# Altium PCB PCB3.PcbDoc
Units mil, origin at the board's own origin, x right, y up, seen from the top; angles counter-clockwise.
Board outline 2126.15 x 984.42 mil, 2 copper layers (Top Layer, Bottom Layer), stack 61.756 mil thick; 39 components, 44 nets, 185 pads, 55 vias.
Unrouted connection lines stored in the file: 1.
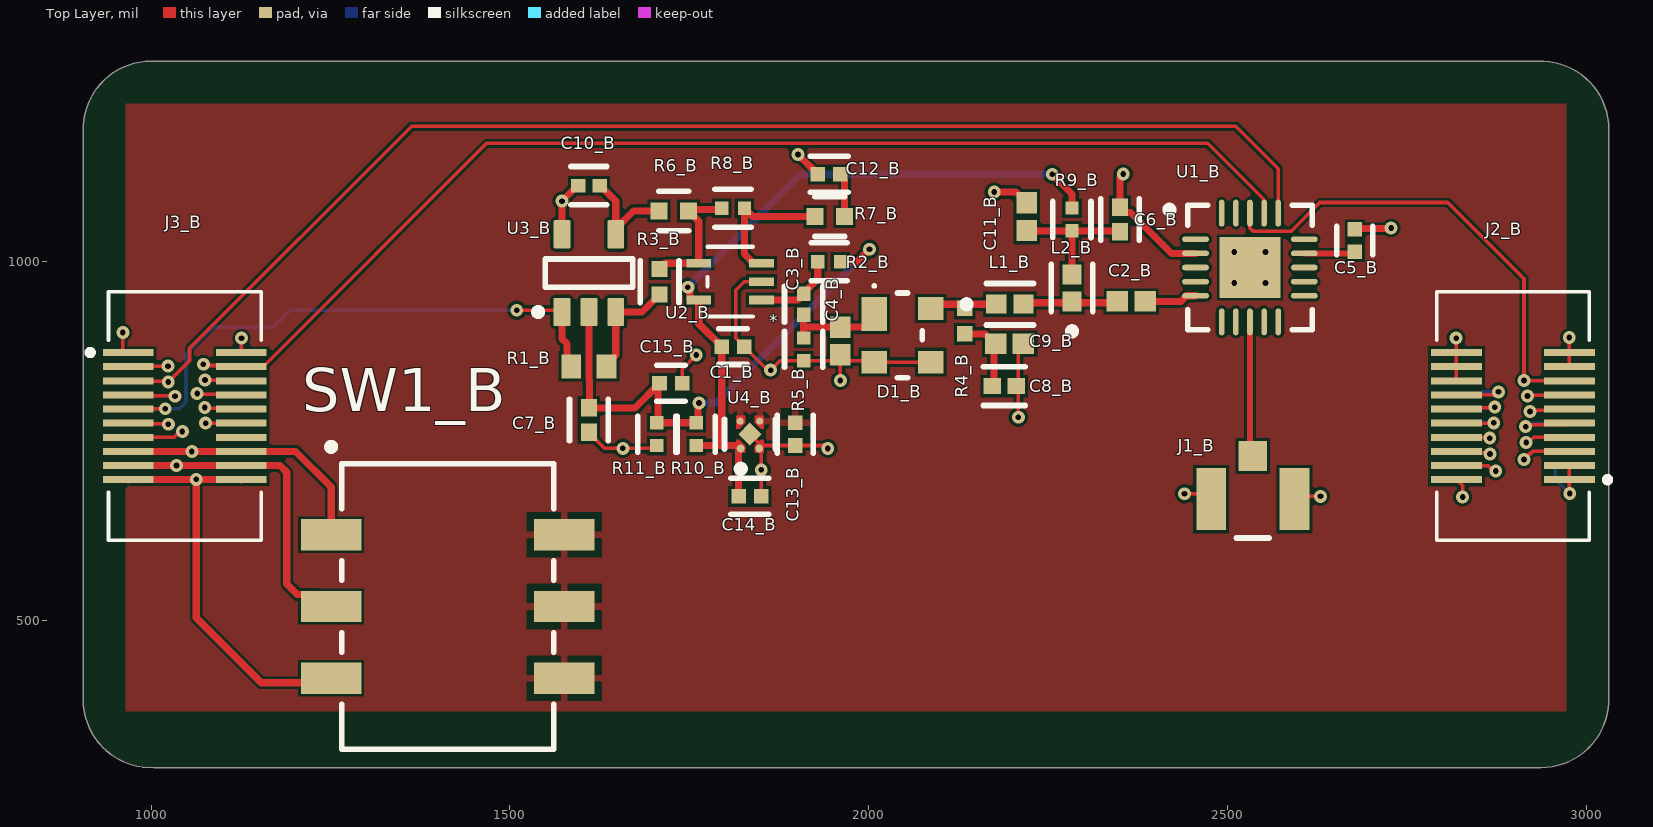
[diagram p0: Top Layer view]
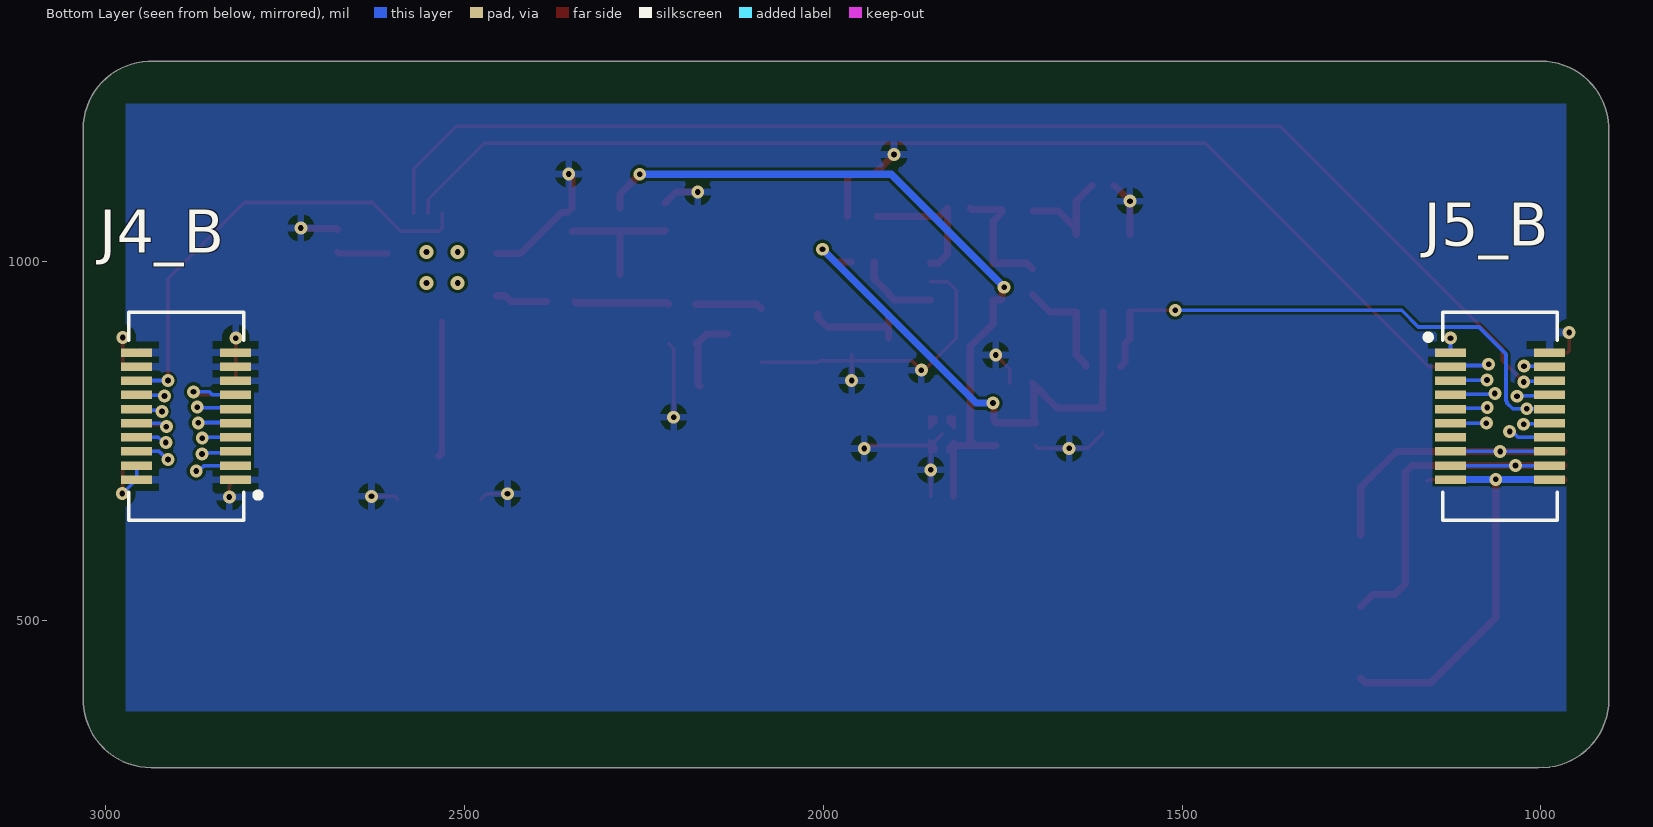
[diagram p1: Bottom Layer view, seen from below]
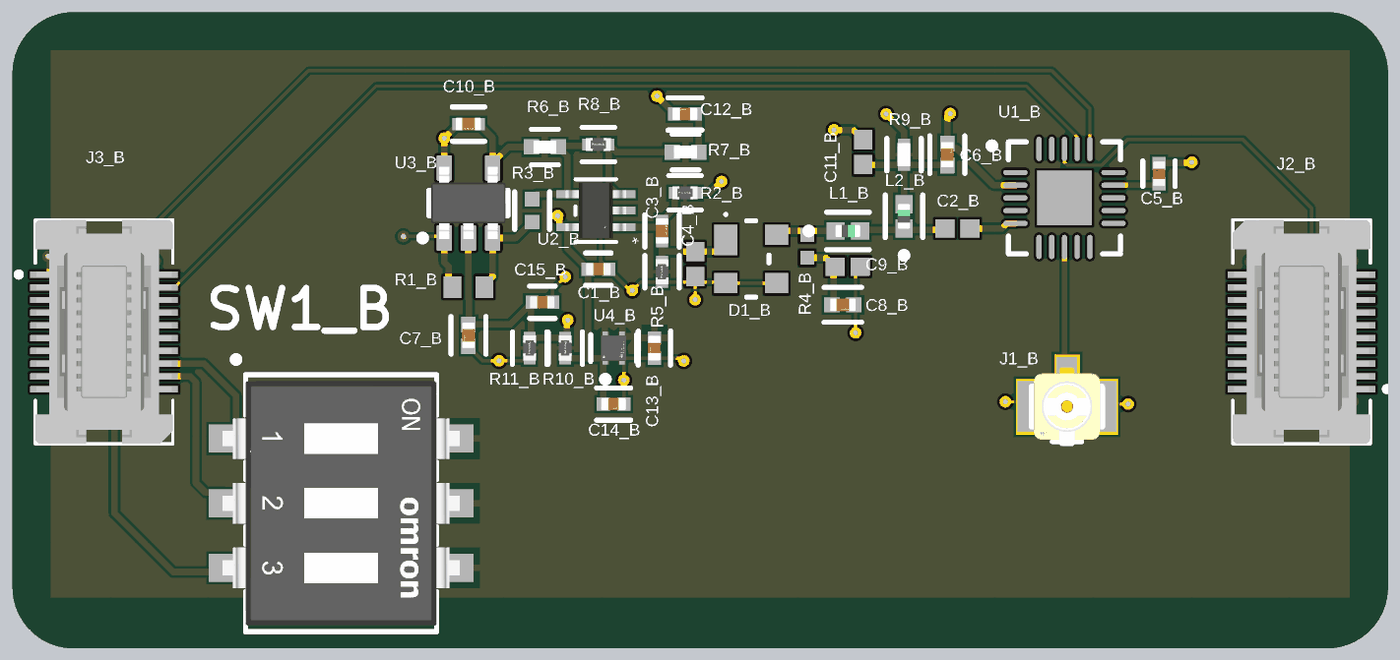
[diagram p2: 3D render of the assembled board from above, using the file's embedded part models]

## Layer stack, top to bottom
Top Solder: solder mask 1, SM-001, Dk 4
Top Layer: signal copper 1.378
Dielectric 1: core 59, Core-043, Dk 4.3
Bottom Layer: signal copper 1.378
Bottom Solder: solder mask 1, SM-001, Dk 4

## Board outline
905.51,389.85 905.51,1181.1 cw(c1000,1185.04) 1000,1279.61 2932.99,1279.61 2933.07,1279.53 cw(c2937.01,1185.04) 3031.58,1185.04 3031.58,393.78 3031.5,393.7 cw(c2937.01,389.76) 2937.01,295.19 1004.02,295.19 1003.94,295.28 cw(c1000,389.76)

## Design rules (kind name [scope] priority, off if disabled: settings)
Clearance [All] p1: gap=4 ignorepadtopadclearanceinfootprint=FALSE
PolygonConnect [All] p1: connectstyle=Relief reliefconductorwidth=10 reliefentries=4 polygonreliefangle="90 Angle" airgapwidth=10
RoutingVias [All] p1: holewidth=8 width=18 viastyle="Through Hole" minholewidth=8 minwidth=18 maxholewidth=28 maxwidth=50
SolderMaskExpansion [All] p1: expansion=4 istentingtop=FALSE
Width [All] p1: maxlimit=50 minlimit=4 preferedwidth=5
30 further rules are at their usual default settings.

## Components (designator, comment, footprint, x,y, rotation, side; value= is the part's Value field where it differs from the comment)
C1_B "C0402C104K8PACTU" FP-C0402-BB-MFG 1811.02,881.89 r180 top value="0.10 μF"
C2_B "GRM1555C1H820JA01D" CAPC1005X55X25ML05T10 2366.14,944.88 r180 top value=82pF
C3_B "CL05B103KB5NNNC" FP-CL165-IPC_C 1909.45,940.94 r90 top
C4_B "GRM1555C1H820JA01D" CAPC1005X55X25ML05T10 1960.63,889.76 r90 top value=82pF
C5_B "C0402C339C5GACTU" FP-C0402-BB-MFG 2677.65,1029.63 r90 top value="3.3 pF"
C6_B "GRM1555C1H102JA01D" FP-GRM155-0_05-IPC_B 2350.39,1059.06 r90 top
C7_B "GRM1555C1H102JA01D" FP-GRM155-0_05-IPC_B 1610.24,779.53 r270 top
C8_B "GRM1555C1H102JA01D" FP-GRM155-0_05-IPC_B 2188.98,826.77 r0 top
C9_B "GRM1555C1H820JA01D" CAPC1005X55X25ML05T10 2196.46,885.83 r180 top value=82pF
C10_B "CL05B103KB5NNNC" FP-CL165-IPC_C 1610.24,1106.3 r0 top
C11_B "GRM1555C1H820JA01D" CAPC1005X55X25ML05T10 2220.47,1062.99 r90 top value=82pF
C12_B "C0402C105K8PACTU" FP-C0402C105K8PACTU-MFG 1944.88,1122.05 r180 top
C13_B "C0402C105K8PACTU" FP-C0402C105K8PACTU-MFG 1897.64,759.84 r270 top
C14_B "C0402C105K8PACTU" FP-C0402C105K8PACTU-MFG 1834.65,673.23 r0 top
C15_B "C0402C104K8PACTU" FP-C0402-BB-MFG 1724.41,830.71 r0 top value="0.10 μF"
D1_B "BAT15-099" INF-SOT143-4-1_V 2047.24,897.64 r0 top
J1_B "U.FL-R-SMT-1(10)" FP-U_FL-R-SMT-1_10-MFG 2535.43,669.29 r0 top
J2_B "52991-0208" MOLEX_52991-0208 2898,785 r90 top
J3_B "52991-0208" MOLEX_52991-0208 1047,785 r270 top
J4_B "53916-0208" "MOLEX-  539160208" 2898,785 r90 bottom
J5_B "53916-0208" "MOLEX-  539160208" 1047,785 r270 bottom
L1_B "LQG15HN18NJ02D" FP-LQG15HH_02-IPC_A 2196.85,940.94 r0 top
L2_B "LQG15HN18NJ02D" FP-LQG15HH_02-IPC_A 2283.46,963.72 r90 top
R1_B "ERJ-3EKF1004V" RESC1608X55X30LL15T15 1610.24,854.33 r180 top
R2_B "ERJ-2RKF1003X" FP-ERJ2RK-IPC_C 1944.88,1000 r0 top
R3_B "CRCW040210K0FKED" FP-CRCW0402-e3-IPC_B 1708.66,972.44 r270 top
R4_B "620" RESC1005X40X25NL05T05 2133.86,917.32 r90 top
R5_B "ERJ-2RKF1003X" FP-ERJ2RK-IPC_C 1909.45,877.95 r90 top
R6_B "CRCW04021K00FKED" FP-CRCW0402-e3-MFG 1728.35,1070.87 r180 top
R7_B "CRCW04021K00FKED" FP-CRCW0402-e3-MFG 1945.87,1062.99 r180 top
R8_B "ERJ-2RKF1003X" FP-ERJ2RK-IPC_C 1811.02,1074.8 r0 top
R9_B "CRCW0402300KFKED" FP-CRCW0402-e3-IPC_C 2283.46,1059.06 r90 top
R10_B "ERJ-2RKF1003X" FP-ERJ2RK-IPC_C 1759.84,759.84 r270 top
R11_B "ERJ-2RKF1003X" FP-ERJ2RK-IPC_C 1704.72,759.84 r90 top
SW1_B "A6SN-3101" FP-A6SN-3101-MFG 1413.39,519.68 r270 top
U1_B "ADG904BCPZ" ADI-CP-20-6_N 2531.5,992.13 r0 top
U2_B "max9914exk+t" 21-0076E_MXM 1807.09,972.44 r180 top
U3_B "LMC7215IM5" DBV0005A_N 1610.24,984.25 r90 top
U4_B "TPS7A0222PDQNR" FP-DQN0004A-MFG 1834.65,759.84 r90 top

## Footprints (in the part's own frame and the unit in brackets; to place one, negate y for a bottom-side part, rotate by r counter-clockwise, add the part's x,y. Pads: shape width x height; smd on the part's side, far side on the other; paste and mask are expansions set on the pad)
21-0076E_MXM [mil]
  rect 34.5x12 smd paste+0 mask+0: 1(-43.75,25.59) 2(-43.75,0) 3(-43.75,-25.59) 4(43.75,-25.59) 5(43.75,25.59)
  silkscreen extent -32,-49 32,49, body extent -47,-44 47,44, height 43
ADI-CP-20-6_N [mm] "QFN, 20-Leads, Body 4x4mm, Pitch 0.5mm, Thermal Pad 2.15x2.15mm, IPC Medium Density"
  oval 0.95x0.2 smd: 1(-1.925,1) 2(-1.925,0.5) 3(-1.925,0) 4(-1.925,-0.5) 5(-1.925,-1) 11(1.925,-1) 12(1.925,-0.5) 13(1.925,0) 14(1.925,0.5) 15(1.925,1)
  oval 0.2x0.95 smd: 6(-1,-1.925) 7(-0.5,-1.925) 8(0,-1.925) 9(0.5,-1.925) 10(1,-1.925) 16(1,1.925) 17(0.5,1.925) 18(0,1.925) 19(-0.5,1.925) 20(-1,1.925)
  rect 2.15x2.15 smd: 21(0,0)
  silkscreen extent -2.97,-2.2 2.2,2.2, body extent -2.05,-2.05 2.05,2.05, height 0.8
CAPC1005X55X25ML05T10 [mm] "Chip Capacitor, 2-Leads, Body 1.00x0.50mm, IPC Low Density"
  rect 0.76x0.72 smd: 1(-0.49,0) 2(0.49,0)
  body extent -0.53,-0.28 0.53,0.27, height 0.55
DBV0005A_N [mm] "SOT23, 5-Leads, Body 3.05x1.75mm, Pitch 0.95mm, IPC Medium Density"
  rrect17% 1x0.6 smd: 1(-1.375,0.95) 2(-1.375,0) 3(-1.375,-0.95) 4(1.375,-0.95) 5(1.375,0.95)
  silkscreen extent -1.5,-1.55 0.5,1.92, body extent -1.42,-1.46 1.42,1.46, height 1.08
FP-A6SN-3101-MFG [mm]
  rect 1.1x2.15 smd paste+0 mask+0: 1(-2.54,-4.125) 2(0,-4.125) 3(2.54,-4.125) 4(2.54,4.125) 5(0,4.125) 6(-2.54,4.125)
  silkscreen extent -5.77,-4.25 5.05,3.75, body extent -5.15,-5.3 5.15,5.3, height 0.25
FP-C0402-BB-MFG [mm]
  rect 0.52x0.52 smd paste+0 mask+0: 1(-0.4,0) 2(0.4,0)
  silkscreen extent -0.5,-0.64 0.5,0.64, body extent -0.8,-0.4 0.8,0.4, height 0.25
FP-C0402C105K8PACTU-MFG [mm]
  rect 0.52x0.52 smd paste+0 mask+0: 1(-0.4,0) 2(0.4,0)
  silkscreen extent -0.67,-0.64 0.67,0.64, body extent -0.8,-0.4 0.8,0.4, height 0.25
FP-CL165-IPC_C [mil]
  rect 20.29x18.6 smd paste+0 mask+0: 1(-14.9,0) 2(14.9,0)
  silkscreen extent -25,-27 25,27, body extent -29,-15 29,15, height 10
FP-CRCW0402-e3-IPC_B [mil]
  rect 22.37x22.54 smd paste+0 mask+0: 1(-17.8,0) 2(17.8,0)
  silkscreen extent -29,-27 29,27
FP-CRCW0402-e3-IPC_C [mil]
  rect 18.43x18.6 smd paste+0 mask+0: 1(-15.83,0) 2(15.83,0)
  silkscreen extent -25,-27 25,27, body extent -29,-15 29,15, height 10
FP-CRCW0402-e3-MFG [mm]
  rect 0.6x0.6 smd paste+0 mask+0: 1(-0.525,0) 2(0.525,0)
  silkscreen extent -0.53,-0.7 0.53,0.7, body extent -0.92,-0.4 0.92,0.4, height 0.25
FP-DQN0004A-MFG [mm]
  round 0.279 smd paste-1000 mask-1000: 1(-0.505,0.33) 2(-0.505,-0.33)
  round 0.251 smd paste-1000 mask-1000: 3(0.459,-0.346) 4(0.459,0.346)
  rect 0.58x0.58 smd rot 135 paste-1000 mask-1000: 5(0,0)
  Top Layer region: -0.66,-0.485 -0.2,-0.485 -0.2,-0.385 -0.41,-0.175 -0.66,-0.175
  Top Layer region: 0.66,0.485 0.2,0.485 0.2,0.385 0.41,0.175 0.66,0.175
  Top Layer region: 0.66,-0.485 0.2,-0.485 0.2,-0.385 0.41,-0.175 0.66,-0.175
  Top Layer region: -0.66,0.485 -0.2,0.485 -0.2,0.385 -0.41,0.175 -0.66,0.175
  silkscreen extent -1.35,-0.9 0.53,0.9, body extent -0.76,-0.63 0.76,0.63, height 0.25
FP-ERJ2RK-IPC_C [mil]
  rect 18.43x18.6 smd paste+0 mask+0: 1(-15.83,0) 2(15.83,0)
  silkscreen extent -25,-27 25,27, body extent -29,-15 29,15, height 10
FP-GRM155-0_05-IPC_B [mil]
  rect 24.23x22.54 smd paste+0 mask+0: 1(-16.87,0) 2(16.87,0)
  silkscreen extent -29,-27 29,27, body extent -35,-17 35,17, height 10
FP-LQG15HH_02-IPC_A [mil]
  rect 28.16x26.48 smd paste+0 mask+0: 1(-18.84,0) 2(18.84,0)
  silkscreen extent -65,-29 33,29, body extent -41,-21 41,21, height 10
FP-U_FL-R-SMT-1_10-MFG [mm]
  rect 1x1.05 smd paste-1000 mask+0: 1(0,1.525)
  rect 1.05x2.2 smd paste-1000 mask+0: 2(-1.475,0) 3(1.475,0)
  silkscreen extent -0.58,-1.38 0.58,-1.38, body extent -2.1,-1.48 2.1,2.15, height 0.25
INF-SOT143-4-1_V [mm] "SOT143, 4-Leads, Body 2.9x1.3 mm"
  rect 0.9x1.2 smd: 1(-1,0.75)
  rect 0.9x0.8 smd: 2(-1,-0.95) 3(1,-0.95) 4(1,0.95)
  silkscreen extent -1.05,-1.5 0.7,1.8, body extent -0.65,-1.45 0.65,1.45, height 1.1
"MOLEX-  539160208" [mm]
  rect 0.3x1.1 smd: 1(-2.25,1.5) 2(-2.25,-2) 3(-1.75,1.5) 4(-1.75,-2) 5(-1.25,1.5) 6(-1.25,-2) 7(-0.75,1.5) 8(-0.75,-2) 9(-0.25,1.5) 10(-0.25,-2) 11(0.25,1.5) 12(0.25,-2) 13(0.75,1.5) 14(0.75,-2) 15(1.25,1.5) 16(1.25,-2) 17(1.75,1.5) 18(1.75,-2) 19(2.25,1.5) 20(2.25,-2)
  silkscreen extent -3.68,-2.89 3.68,1.78, body extent -3.65,-2.3 3.65,1.8, height 3.46
MOLEX_52991-0208 [mm]
  rect 0.25x1.8 smd: 1(-2.25,-2) 2(-2.25,2) 3(-1.75,-2) 4(-1.75,2) 5(-1.25,-2) 6(-1.25,2) 7(-0.75,-2) 8(-0.75,2) 9(-0.25,-2) 10(-0.25,2) 11(0.25,-2) 12(0.25,2) 13(0.75,-2) 14(0.75,2) 15(1.25,-2) 16(1.25,2) 17(1.75,-2) 18(1.75,2) 19(2.25,-2) 20(2.25,2)
  silkscreen extent -4.4,-3.45 4.4,2.7, body extent -4.4,-2.7 4.4,2.7, height 2.28
RESC1005X40X25NL05T05 [mm] "Chip Resistor, 2-Leads, Body 1.00x0.50mm, IPC Medium Density"
  rect 0.55x0.55 smd: 1(-0.45,0) 2(0.45,0)
  body extent -0.53,-0.27 0.53,0.28, height 0.4
RESC1608X55X30LL15T15 [mm] "Chip Resistor, 2-Leads, Body 1.60x0.80mm, IPC High Density"
  rect 0.7x0.85 smd: 1(-0.625,0) 2(0.625,0)
  body extent -0.87,-0.48 0.87,0.48, height 0.55

## Part data
C1_B C15_B: library part CMP-2008-02046-2, "CAP CER 0.1UF 10V X5R 0402", Capacitance="0.10 μF", Manufacturer=Kemet, Package=C0402-BB, Temperature="-55°C to +125°C", Temperature Characteristic=X5R, Temperature Coefficient=15%, Temperature Range High=+125°C, Temperature Range Low=-55°C, Tolerance=0.1, Voltage Rating="10 V", Automotive=No, Category=Cap, ComponentLink2Description=Datasheet, ComponentLink2URL=https://content.kemet.com/datasheets/KEM_C1002_X7R_SMD.pdf, Device Class L1="Passive Components", Device Class L2=Capacitors, Device Class L3="Ceramic Capacitors", Digikey Description="CAP CER 0.1UF 10V X5R 0402", Height=0.55mm, Ipc Land Pattern Name=CAPC10050X50, Lead Free=Yes, Manufacturer Part Number=C0402C104K8PACTU, Material=Ceramic, Mouser Description="Capacitor 100 nF 10 VDC 0402", Octopart=https://octopart.com/c0402c104k8pactu-kemet-140039, RoHS=TRUE
C2_B C4_B C9_B C11_B: library part CMP-2008-04442-1, Manufacturer=Murata, Part Number=GRM1555C1H820JA01D
C3_B C10_B: library part CMP-13271-000387-1, "Cap Ceramic 10nF 50V X7R ±10% SMD 0402 +125°C Paper T/R", Capacitance=10nF, Case Code (Imperial)=0402, Case Code (Metric)=1005, Dielectric=X7R, Max Operating Temperature=125°C, Min Operating Temperature=-55°C, Package Quantity=1, Tolerance=10%, Voltage=50V, Case/Package=0402, Contact Plating=Tin, Depth=0.5mm, Height=0.5mm, Lead Free="Lead Free", Length=1mm, Material=Ceramic, Mount="Surface Mount", Packaging="Tape and Reel", Radiation Hardening=No, Thickness=0.022inch, Voltage Rating=50V, Voltage Rating (DC)=50V, Width=0.02inch
C5_B: library part CMP-2008-03312-2, "Capacitor: ceramic; MLCC; 3.3pF; 50VDC; C0G; ±0.25pF; SMD; 0402", Capacitance="3.3 pF", Manufacturer=Kemet, Package=C0402-BB, Temperature="-55°C to +125°C", Temperature Characteristic=C0G, Temperature Coefficient=15%, Temperature Range High=+125°C, Temperature Range Low=-55°C, Tolerance="0.25 pF", Voltage Rating="50 V", Automotive=No, Category=Cap, ComponentLink2Description=Datasheet, ComponentLink2URL=https://content.kemet.com/datasheets/KEM_C1002_X7R_SMD.pdf, Device Class L1="Passive Components", Device Class L2=Capacitors, Device Class L3="Ceramic Capacitors", Digikey Description="Capacitor: ceramic; MLCC; 3.3pF; 50VDC; C0G; ±0.25pF; SMD; 0402", Height=0.55mm, Ipc Land Pattern Name=CAPC10050X50, Lead Free=Yes, Manufacturer Part Number=C0402C339C5GACTU, Material=Ceramic, Mouser Description="Multilayer Ceramic Capacitors MLCC - SMD/SMT 50volts 3.3pF C0G .25pF", Octopart=https://octopart.com/c0402c339c5gactu-kemet-105751, RoHS=TRUE
C6_B C7_B C8_B: library part CMP-2008-04254-2, "Chip Multilayer Ceramic Capacitors for General Purpose, 0402, 1000pF, C0G, 30ppm/°C, 5%, 50V", Capacitance=1nF, Case Code (Imperial)=0402, Case Code (Metric)=1005, Dielectric=C0G, Dielectric Material=Ceramic, Insulation Resistance=10GR, Max Operating Temperature=125°C, Min Operating Temperature=-55°C, Package Quantity=1, Temperature Coefficient=30ppm/°C, Tolerance=5%, Voltage=50V, Case/Package=0402, Depth=0.5mm, Height=0.5mm, Lead Free="Lead Free", Length=1mm, Material=Ceramic, Mount="Surface Mount", Number of Pins=2, Packaging="Tape and Reel", Radiation Hardening=No, REACH SVHC="No SVHC", Termination=SMD/SMT, Thickness=0.022inch, Voltage Rating=50V, Voltage Rating (DC)=50V, Width=0.5mm
C12_B C13_B C14_B: library part CMP-2008-02081-2, "CAP CER 1UF 10V X5R 0402", Capacitance=1uF, Case Code (Imperial)=0402, Case Code (Metric)=1005, Dielectric=X5R, Dielectric Material=Ceramic, Max Operating Temperature=85°C, Min Operating Temperature=-55°C, Package Quantity=1, Tolerance=10%, Voltage=10V, Case/Package=0402, Construction=Flat, Contact Plating=Tin, Depth=0.5mm, Dissipation Factor=5%, Height=0.5mm, Lead Free="Lead Free", Length=1mm, Mount="Surface Mount", Number of Pins=2, Packaging="Tape and Reel", Radiation Hardening=No, REACH SVHC="No SVHC", RoHS Compliant=Yes, Series=C, Termination=SMD/SMT, Thickness=0.022inch, Voltage Rating=10V, Voltage Rating (DC)=10V, Width=0.5mm
D1_B: library part CMP-1154-00009-1, "Single Silicon Schottky Diode, 110 mA IF Max, SOT143-4-1, Green", Manufacturer=Infineon, ComponentLink1Description="Manufacturer URL", ComponentLink1URL=http://www.infineon.com/, ComponentLink2Description=Datasheet, ComponentLink2URL=http://www.infineon.com/dgdl/bat15series.pdf?folderId=db3a304314dca3890114ff6812070b44&fileId=db3a304314dca3890114ff6b74ca0b48&location=en.Products.RF.RF_Mixer___Detector_Schottky_Diodes.DATASHEET.bat15series.pdf, ComponentLink3Description="Package Specification", ComponentLink3URL=http://www.infineon.com/dgdl/SOT143-Package_Overview.pdf?folderId=db3a30431936bc4b011952ce8b1b3bed&fileId=db3a30431936bc4b011952df42203c0c, Configuration=Single, CT (typ)="0.26 pF", DatasheetVersion=Jun-2011, Green=yes, Group="RF Mixer", IF (max)="110 mA", Mounting Technology="Surface Mount", PackageDescription="4-Pin Small Outline Transistor Package, 1.3 x 2.9 mm Body", PackageReference=SOT143-4-1, PartNumber=BAT15-099, VF (typ)="0.23 V", VR (max)="4 V"
J1_B: library part CMP-2000-05152-3, "CONN U.FL RCPT STR 50 OHM SMD", Dielectric Material=Polymer, Frequency=6GHz, Housing Color=Beige, Insulation Resistance=500MR, Max Operating Temperature=90°C, Min Operating Temperature=-40°C, Package Quantity=2500, Body Material=Bronze, Body Plating=Silver, Connector Type=Coaxial, Contact Material=Brass, Contact Plating=Gold, Depth=3.1mm, Fastening Type=Snap, Gender=Male, Impedance=50R, Lead Free="Lead Free", Length=3mm, Max Frequency=6GHz, Mount="Surface Mount", Orientation=Straight, Packaging="Cut Tape", Radiation Hardening=No, REACH SVHC="No SVHC", Series=U.FL, Termination=Solder, Weight=0.001764oz, Wire/Cable Type=Coaxial
J2_B J3_B: "20 Position Connector Receptacle, Center Strip Contacts Surface Mount Gold", Package=None, Availability=Unavailable, MF=Molex, MP=52991-0208, Price=None, SnapEDA_Link=https://www.snapeda.com/parts/52991-0208/Molex/view-part/230631/?ref=snap
L1_B L2_B: library part CMP-06042-010999-1, "Multilayer type RF Inductor 18nH ±5% 0.51Ω 350mA 0402", Case Code (Imperial)=0402, Case Code (Metric)=1005, Current Rating=300mA, DC Resistance (DCR)=510mR, Inductance=18nH, Inductance Tolerance=5%, Max Operating Temperature=125°C, Min Operating Temperature=-55°C, Package Quantity=1, Self Resonant Frequency=2.1GHz, Test Frequency=100MHz, Case/Package=0402, Core Material=Air, DC Current=300mA, Depth=0.55mm, Height=0.5mm, Height - Seated (Max)=0.022inch, Lead Free="Lead Free", Length=1mm, Max DC Current=300mA, Military Standard=Not, Mount="Surface Mount", Packaging="Tape and Reel", Q Factor=8, Radiation Hardening=No, REACH SVHC="No SVHC", Shielding=Unshielded, Termination=SMD/SMT, Tolerance=5%, Width=0.5mm
R1_B: library part CMP-1012-00849-2, Manufacturer=Panasonic, Resistance=1M, Part Number=ERJ-3EKF1004V
R2_B R5_B R8_B R10_B R11_B: library part CMP-2002-00608-4, "RES SMD 100K OHM 1% 1/10W 0402", Case Code (Imperial)=0402, Case Code (Metric)=1005, Max Operating Temperature=155°C, Max Power Dissipation=100mW, Min Operating Temperature=-55°C, Package Quantity=1, Resistance=100kR, Temperature Coefficient=100ppm/°C, Tolerance=1%, Voltage Rating=50V, Case/Package=0402, Composition="Thick Film", Contact Plating=Tin, Depth=0.5mm, Features="Automotive AEC-Q200", Height=0.35mm, Lead Free="Lead Free", Length=1mm, Military Standard=Not, Mount="Surface Mount", Number of Pins=2, Number of Terminations=2, Packaging="Tape and Reel", Power Rating=100mW, Radiation Hardening=No, REACH SVHC="No SVHC", Termination=SMD/SMT, Voltage Rating (DC)=50V, Width=0.5mm
R3_B: library part CMP-2002-08135-2, "RES SMD 10K OHM 1% 1/16W 0402", Case Code (Imperial)=0402, Case Code (Metric)=1005, Max Operating Temperature=155°C, Max Power Dissipation=63mW, Min Operating Temperature=-55°C, Package Quantity=10, Resistance=10kR, Temperature Coefficient=100ppm/°C, Tolerance=1%, Voltage Rating=50V, Case/Package=0402, Composition="Thick Film", Contact Plating=Tin, Depth=0.5mm, Features="Automotive AEC-Q200", Height=0.35mm, Lead Free="Lead Free", Length=1mm, Military Standard=Not, Mount="Surface Mount", Number of Pins=2, Number of Terminations=2, Packaging="Tape and Reel", Power Rating=63mW, Radiation Hardening=No, Termination=SMD/SMT, Voltage Rating (DC)=50V, Weight=2.3E-05oz, Width=0.02inch
R4_B: library part CMP-2002-01019-1, Manufacturer=Panasonic, Part Number=ERJ-2RKF6200X
R6_B R7_B: library part CMP-2002-08276-2, "RES Thick Film, 1kΩ, 1%, 0.063W, 100ppm/°C, 0402", Case Code (Imperial)=0402, Case Code (Metric)=1005, Max Operating Temperature=155°C, Max Power Dissipation=63mW, Min Operating Temperature=-55°C, Package Quantity=10, Resistance=1kR, Temperature Coefficient=100ppm/°C, Tolerance=1%, Voltage Rating=50V, Case/Package=0402, Composition="Thick Film", Contact Plating=Tin, Depth=0.5mm, Features="Automotive AEC-Q200", Height=0.35mm, Lead Free="Lead Free", Length=1mm, Military Standard=Not, Mount="Surface Mount", Number of Pins=2, Number of Terminations=2, Packaging="Tape and Reel", Power Rating=63mW, Radiation Hardening=No, Termination=SMD/SMT, Voltage Rating (DC)=50V, Weight=2.3E-05oz, Width=0.5mm
R9_B: library part CMP-2002-08495-2, "RES Thick Film, 300kΩ, 1%, 0.063W, 100ppm/°C, 0402", Case Code (Imperial)=0402, Case Code (Metric)=1005, Max Operating Temperature=155°C, Max Power Dissipation=63mW, Min Operating Temperature=-55°C, Package Quantity=10, Resistance=300kR, Temperature Coefficient=100ppm/°C, Tolerance=1%, Voltage Rating=50V, Case/Package=0402, Composition="Thick Film", Contact Plating=Tin, Depth=0.5mm, Features="Automotive AEC-Q200", Height=0.35mm, Lead Free="Lead Free", Length=1mm, Military Standard=Not, Mount="Surface Mount", Number of Pins=2, Number of Terminations=2, Packaging="Tape and Reel", Power Rating=63mW, Radiation Hardening=No, Termination=SMD/SMT, Voltage Rating (DC)=50V, Weight=2.3E-05oz, Width=0.02inch
SW1_B: library part CMP-08827-000007-1, "SWITCH SLIDE DIP SPST 25MA 24V", Ambient Temperature Range High=+85°C, Ambient Temperature Range Low=-30°C, Contact Resistance=200mΩ, Current Rating=25mA, Manufacturer="Omron Electronics Inc-EMC Div", Temperature="-30°C to +85°C", Voltage Rating Dc=24V, Automotive=No, Category=Switch, ComponentLink2Description=Datasheet, ComponentLink2URL=https://omronfs.omron.com/en_US/ecb/products/pdf/en-a6sn.pdf, Device Class L1=Electromechanical, Device Class L2=Switches, Device Class L3="DIP Switches", Digikey Description="SWITCH SLIDE DIP SPST 25MA 24V", Electromechanical Life=1000Cycles, Height=4.55mm, Lead Free=Yes, Manufacturer Part Number=A6SN-3101, Mouser Description="DIP Switches / SIP Switches 3P Knife-Edge, 2.3mm Slide SMT Flat-Act", Number Of Circuits=3, Octopart=https://octopart.com/a6sn-3101-omron-55396000, Package=A6SN-3101, RoHS=TRUE, Standoff Height=0.7mm, Temperature Range High=+85°C, Temperature Range Low=-30°C, Throw Configuration=SPST
U1_B: library part CMP-0290-00002-2, "Wideband 2.5 GHz, 37 dB Isolation at 1 GHz, CMOS 1.65 to 2.75 V, 4:1 Mux / SP4T, -40 to 85 degC, 20-pin QFN (CP-20-1), Tray", Manufacturer="Analog Devices", Bandwidth (Hz)=2.5G, Code_JEDEC=MO-220, ComponentLink1Description="Manufacturer URL", ComponentLink1URL=http://www.analog.com/en/index.html, ComponentLink2Description=Datasheet, ComponentLink2URL=http://www.analog.com/static/imported-files/data_sheets/ADG904_904R.pdf, ComponentLink3Description="Package Specification", ComponentLink3URL=http://www.analog.com/static/imported-files/packages/PKG_PDF/LFCSP(CP)/CP_20_6.pdf, DatasheetVersion="Rev. B", Mounting Technology="Surface Mount", PackageDescription="20-Pin Lead Frame Chip Scale Package, Body 4 x 4 mm, Pitch 0.5 mm", PackageReference=CP-20-6, PackageVersion="061708-A, 07/2011", Packing=Tray, PartNumber=ADG904BCPZ, Supply V Guar Performance=Single_(+2.5V), t transition (s)=12n
U2_B: "No Description Available", Built_By=EMA_UL_Team, Copyright="Copyright (C) 2021 Accelerated Designs. All rights reserved", Manufacturer_Part_Number=max9914exk+t, RefDes=RefDes, SourceLibrary=Maxim_2009-12-17_3b, Type=DEV, Vendor="Maxim Integrated Products"
U3_B: library part CMP-0055-01229-3, "Micro-Power, Rail-to-Rail CMOS Comparators with Open-Drain/Push-Pull Outputs, 5-pin SOT-23", Manufacturer="Texas Instruments", Package Reference=DBV0005A, PackageTopMarking=C02B*XTT, PowerWise=Y, ComponentLink1Description="Datasheet URL", ComponentLink1URL=http://www.ti.com/general/docs/lit/getliterature.tsp?genericPartNumber=LMC7215&fileType=pdf, CompType=Amplifiers, PackageDescription="Molded SOT-23, .115 x .063 x .040 in Body, 5 Lead, .0375 in Pitch", PinCount=5, RoHS=N
U4_B: library part CMP-04917-000120-1, "IC REG LINEAR 1.8V 200MA 4X2SON"

## Via types
v1: diameter 18, hole 8, Top Layer to Bottom Layer, 51 vias
v2: diameter 19.68, hole 7.87, Top Layer to Bottom Layer, 4 vias

## Nets (pads, with @x,y where several pads share a name; then routed paths per layer and width w, separated by ;. In a path a pad name is that pad's centre, name@x,y a point inside that pad or via, vN(x,y) a via of type N, cw(c..) or ccw(c..) an arc to the next point about the centre after c; other vN are vias at no path point)
1v1: C7_B.1 C15_B.1 R2_B.2 R10_B.1 R11_B.2 U3_B.2 | length 754.5
  Top Layer w10: C7_B.1 1674.35,796.4 C15_B.1@1706.69,828.74 ; U3_B.2 1610.24,835.7 1610.84,835.1 C7_B.1@1610.84,800.86 ; C15_B.1 C15_B.1@1706.69,828.74 ; v1(1763.78,803.15) 1762.25,801.62 1762.25,778.08 R10_B.1 R11_B.2 1706.69,777.64 C15_B.1@1706.69,828.74 ; R2_B.2 1983.78,1000 v1(2001.32,1017.54)
  Bottom Layer w10: v1(1763.78,803.15) 1786.93,803.15 v1(2001.32,1017.54)
2v2: C1_B.2 C14_B.1 R9_B.2 R10_B.2 U2_B.5 U4_B.1 | length 1012.5
  Top Layer w10: v1(1748.03,964.57) 1748.03,962.4 1751.09,959.35 1751.09,947.85 1752.09,946.85 U2_B.5 1763.34,913.83 C1_B.2 1795.28,750.7 1788.59,744.01 ; R10_B.2 1788.59,744.01 ; C14_B.1 1818.9,736.94 1821.65,739.69 U4_B.1 1821.39,739.96 1817.34,744.01 1788.59,744.01 ; v1(2255.91,1122.05) 2283.46,1094.49 R9_B.2
  Bottom Layer w10: v1(1748.03,964.57) 1905.51,1122.05 v1(2255.91,1122.05)
AIN6: J3_B.8 J5_B.8 | length 124.7
  Top Layer w5: v1(1064.17,816.45) 1065.13,815.49 1124.78,815.49 J3_B.8
  Bottom Layer w5: v1(1064.17,816.45) 1065.13,815.49 1124.78,815.49 J5_B.8
AIN7: J3_B.9 J5_B.9 R1_B.2 U3_B.1 | length 814.8
  Top Layer w5: J3_B.9 968.48,795.06 1019.47,795.06 v1(1019.68,795.28) ; v1(1509.65,932.56) 1570.39,932.56 U3_B.1
  Top Layer w10: U3_B.1 1572.83,892.76 1579.53,886.06 1579.53,860.43 R1_B.2
  Bottom Layer w5: J5_B.9 988.16,795.06 1019.47,795.06 v1(1019.68,795.28) 1039.37,795.28 1047.24,803.15 1047.24,804.82 1048.67,806.24 1048.67,871.5 1086.37,909.2 1170.8,909.2 1194.16,932.56 v1(1509.65,932.56)
GND: C1_B.1 C4_B.1 C5_B.2 C6_B.2 C7_B.2 C8_B.2 C9_B.1 C10_B.1 C11_B.2 C12_B.2 C13_B.2 C14_B.2 C15_B.2 D1_B.2 D1_B.3 J1_B.2 J1_B.3 J2_B.1 J2_B.2 J2_B.3 J2_B.16 J2_B.17 J2_B.18 J2_B.19 J2_B.20 J3_B.1 J3_B.2 J4_B.1 J4_B.2 J4_B.3 J4_B.16 J4_B.17 J4_B.18 J4_B.19 J4_B.20 J5_B.1 J5_B.2 R5_B.1 R11_B.1 U1_B.2 U2_B.2 U3_B.5 U4_B.2 U4_B.5 | length 1651.6
  Top Layer w5: v1(960.63,901.57) 960.63,876 963.05,873.58 J3_B.1 ; J3_B.2 1125.74,893.46 v1(1125.98,893.7) ; C7_B.2 1610.24,761.81 1631.89,740.16 v1(1657.48,740.16) 1700.87,740.16 R11_B.1 ; C15_B.2 1740.16,850.39 v1(1759.84,870.08) ; U4_B.5 1850.39,744.09 C13_B.2 1938.98,744.09 v1(1943.12,739.95) ; U4_B.2 1847.64,738.34 1850.39,735.59 v1(1850.39,710.19) C14_B.2 ; U2_B.2 1826.77,972.44 1814.96,960.63 1814.96,893.7 C1_B.1 1859.6,849.06 v1(1863.45,849.06) 1876.51,862.12 R5_B.1 C4_B.1@1960.63,862.12 ; v1(1960.63,834.65) C4_B.1@1960.63,862.12 ; C4_B.1 C4_B.1@1960.63,862.12 ; D1_B.3 D1_B.2 2005.99,862.12 C4_B.1@1960.63,862.12 ; v1(2208.66,783.46) 2208.66,878.74 C9_B.1 ; v1(2440.22,676.81) 2469.84,676.81 J1_B.2 ; J1_B.3 2597.44,673.23 v1(2629.92,673.23) ; v1(2818.9,893.7) 2818.9,873.94 J2_B.20 J2_B.18 J2_B.16 ; J2_B.2 2827.9,687.78 v1(2827.9,672.17) ; v1(2976.51,894.43) 2976.74,894.2 J2_B.19 J2_B.17 ; J2_B.3 J2_B.1 2976.74,677.5 v1(2977.25,676.99)
  Top Layer w10: U3_B.5 v1(1572.83,1084.65) 1594.49,1106.3 C10_B.1 ; v1(1901.57,1149.61) C12_B.2 ; v1(2175.14,1097.27) 2205.49,1097.27 C11_B.2 ; v1(2354.93,1122.53) 2350.39,1118 C6_B.2 2350.39,1075.08 2356.66,1068.81 2365,1068.81 2422.01,1011.81 U1_B.2 ; C5_B.2 2678.58,1046.31 2727.41,1046.31 v1(2728.35,1047.24)
  Bottom Layer w5: J5_B.2 1125.98,873.83 v1(1125.98,893.7) ; J4_B.3 2957.06,697.19 v1(2977.25,676.99)
I2C0_SCL: J2_B.12 J4_B.12 | length 109.1
  Top Layer w5: J2_B.12 2821.25,796.83 2872,796.83 v1(2872.7,797.53)
  Bottom Layer w5: J4_B.12 2821.25,796.83 2872,796.83 v1(2872.7,797.53)
I2C0_SDA: J2_B.13 J4_B.13 | length 98.4
  Top Layer w5: v1(2918.23,813.19) 2918.9,813.86 2976.07,813.86 J2_B.13
  Bottom Layer w5: v1(2918.23,813.19) 2918.9,813.86 2956.38,813.86 J4_B.13
I2C1_SCL: J3_B.10 J5_B.10 | length 103.8
  Top Layer w5: v1(1074.79,797.18) 1075.96,796.01 1124.57,796.01 J3_B.10
  Bottom Layer w5: v1(1074.79,797.18) 1075.9,796.07 1124.52,796.07 J5_B.10
I2C1_SDA: J3_B.11 J5_B.11 | length 93.1
  Top Layer w5: J3_B.11 968.98,774.43 1023.31,774.43 v1(1024.03,773.71)
  Bottom Layer w5: J5_B.11 988.67,774.43 1023.31,774.43 v1(1024.03,773.71)
I2S_CLKEXT: J3_B.3 J5_B.3 | length 91.6
  Top Layer w5: J3_B.3 968.61,854.25 1023.27,854.25 v1(1023.62,854.6)
  Bottom Layer w5: J5_B.3 988.3,854.25 1023.27,854.25 v1(1023.62,854.6)
I2S_SCK: J2_B.10 J4_B.10 | length 105.4
  Top Layer w5: J2_B.10 2869.48,775.16 2870.56,776.24 v1(2871.22,775.58)
  Bottom Layer w5: J4_B.10 2820.18,776.07 2870.4,776.07 2870.56,776.24 v1(2871.22,775.58)
I2S_SDI: J2_B.14 J4_B.14 | length 121
  Top Layer w5: J2_B.14 2873.58,814.53 v1(2877.95,818.9)
  Bottom Layer w5: J4_B.14 2851.29,814.53 2855.66,818.9 v1(2877.95,818.9)
I2S_SDO: J2_B.15 J4_B.15 U1_B.18 | length 714.4
  Top Layer w5: U1_B.18 2531.5,1046.85 2535.63,1042.71 2588.98,1042.71 2628.94,1082.68 2807.09,1082.68 2913.39,976.38 v1(2913.39,834.65) 2913.6,834.43 2976.52,834.43 J2_B.15
  Bottom Layer w5: v1(2913.39,834.65) 2956.62,834.65 J4_B.15
I2S_WS: J2_B.11 J4_B.11 | length 92.8
  Top Layer w5: v1(2921.9,791.49) 2923.57,793.17 2975.07,793.17 J2_B.11
  Bottom Layer w5: v1(2921.9,791.49) 2923.57,793.17 2955.38,793.17 J4_B.11
NetC2_B_1: C2_B.1 U1_B.5 | length 73.5
  Top Layer w10: C2_B.1 2435.2,944.88 2443.07,952.76 U1_B.5
NetC2_B_2: C2_B.2 L1_B.2 L2_B.1 | length 132.8
  Top Layer w10: L1_B.2 2217.66,942.91 2344.88,942.91 C2_B.2
NetC3_B_1: C3_B.1 C4_B.2 D1_B.1 R5_B.2 | length 141.7
  Top Layer w10: R5_B.2 1909.45,909.91 ; C3_B.1 1909.45,909.91 ; D1_B.1 2007.87,921.77 1995.16,909.05 C4_B.2 1910.31,909.05 1909.45,909.91
NetC3_B_2: C3_B.2 R2_B.1 U2_B.1 | length 115.5
  Top Layer w10: U2_B.1 1901.29,946.85 1909.45,955 C3_B.2 1909.45,956.69 1921.38,968.63 1921.98,968.63 1929.05,975.7 R2_B.1
NetC5_B_1: C5_B.1 U1_B.14 | length 71.2
  Top Layer w8: U1_B.14 2675.58,1011.81 C5_B.1
NetC6_B_1: C6_B.1 C11_B.1 L2_B.2 R9_B.1 | length 191.2
  Top Layer w10: C11_B.1 2221.23,1042.94 R9_B.1@2283.46,1042.94 ; L2_B.2 R9_B.1@2283.46,1042.94 ; R9_B.1 R9_B.1@2283.46,1042.94 ; C6_B.1 2349.63,1042.94 R9_B.1@2283.46,1042.94
NetC8_B_1: C8_B.1 C9_B.2 R4_B.1 | length 110.2
  Top Layer w10: R4_B.1 2162.6,899.61 2176.38,885.83 C9_B.2 2174.63,883.3 2174.63,829.3 C8_B.1
NetC10_B_2: C10_B.2 R6_B.2 U3_B.4 | length 148
  Top Layer w10: C10_B.2 1625.98,1106.3 1647.64,1084.65 U3_B.4@1647.64,1046.26 ; U3_B.4 U3_B.4@1647.64,1046.26 ; R6_B.2 1672.24,1070.87 U3_B.4@1647.64,1046.26
NetC12_B_1: C12_B.1 R7_B.1 | length 61.5
  Top Layer w10: C12_B.1 1966.54,1116.14 R7_B.1
NetD1_B_4: D1_B.4 L1_B.1 R4_B.2 | length 93.8
  Top Layer w10: D1_B.4 2092.52,940.94 L1_B.1
NetJ1_B_1: J1_B.1 U1_B.8 | length 188.6
  Top Layer w8: J1_B.1@2531.5,733.27 U1_B.8
  Top Layer w10: J1_B.1@2531.5,733.27 J1_B.1
NetR1_B_1: R1_B.1 R3_B.2 U3_B.3 | length 152.3
  Top Layer w10: R1_B.1 1634.84,857.28 1647.64,870.08 U3_B.3 1684.06,930.12 1708.58,954.64 R3_B.2
NetR3_B_1: R3_B.1 R6_B.1 R8_B.1 U2_B.4 | length 182.8
  Top Layer w10: R3_B.1 R3_B.1 1716.54,998.03 U2_B.4 1763.34,1056.55 1750.98,1068.9 1750.98,1072.83 1793.22,1072.83 R8_B.1
NetR7_B_2: R7_B.2 R8_B.2 U2_B.3 | length 196.5
  Top Layer w10: R8_B.2 R8_B.2@1826.86,1074.72 ; U2_B.3 1839.59,998.03 1826.86,1010.76 R8_B.2@1826.86,1074.72 ; R7_B.2 1838.58,1062.99 R8_B.2@1826.86,1074.72
PDOWN: J3_B.12 J5_B.12 | length 99.5
  Top Layer w5: v1@1076.06,775.19 J3_B.12
  Bottom Layer w5: v1@1076.06,775.24 J5_B.12 J5_B.12
  other v1: 1076.03,775.22
QSPI0_MISO: J2_B.6 J4_B.6 | length 96.7
  Top Layer w5: J2_B.6 2821.01,734.04 2864.39,734.04 v1(2866.14,732.28)
  Bottom Layer w5: J4_B.6 2821.01,734.04 2864.39,734.04 v1(2866.14,732.28)
QSPI0_MOSI: J2_B.5 J4_B.5 | length 116.4
  Top Layer w5: v1(2913.39,724.41) 2921.84,732.86 2922.84,732.86 2925.77,735.79 J2_B.5
  Bottom Layer w5: v1(2913.39,724.41) 2914.39,724.41 2925.77,735.79 J4_B.5
QSPI0_SCK: J2_B.7 J4_B.7 | length 106.8
  Top Layer w5: v1(2916.42,748.36) 2919.94,748.36 2927.05,755.47 J2_B.7
  Bottom Layer w5: v1(2916.42,748.36) 2919.94,748.36 2927.05,755.47 J4_B.7
QSPI0_SDIO2: J2_B.8 J4_B.8 | length 96.9
  Top Layer w5: J2_B.8 2819.48,755.69 2865.93,755.69 2865.97,755.73 2866.07,755.62 2866.07,754.63 v1(2865.73,754.28)
  Bottom Layer w5: J4_B.8 2819.48,755.69 2865.93,755.69 2865.97,755.73 2866.07,755.62 2866.07,754.63 v1(2865.73,754.28)
QSPI0_SDIO3: J2_B.9 J4_B.9 | length 106.1
  Top Layer w5: v1(2915.82,770.35) 2918.22,772.75 2974.34,772.75 J2_B.9
  Bottom Layer w5: v1(2915.82,770.35) 2919.33,770.35 2924.14,775.16 J4_B.9
QSPI0_SS0: J2_B.4 J4_B.4 | length 115.7
  Top Layer w5: J2_B.4 2863.06,716.1 2870.5,708.66 v1(2874.02,708.66)
  Bottom Layer w5: J4_B.4 2863.06,716.1 2870.5,708.66 v1(2874.02,708.66)
SQWOUT: J3_B.13 J5_B.13 | length 137.7
  Top Layer w5: J3_B.13 1031.91,755.47 1040.07,763.63 v1(1043.59,763.63)
  Bottom Layer w5: J5_B.13 1031.91,755.47 1040.07,763.63 v1(1043.59,763.63)
UART0_CTS: J3_B.5 J5_B.5 U1_B.16 | length 1884
  Top Layer w5: J3_B.5 969.07,833.41 1023.07,833.41 v1(1023.88,832.6) 1053.59,862.31 1053.59,879.44 1363.12,1188.98 2511.81,1188.98 2570.87,1129.92 U1_B.16
  Bottom Layer w5: J5_B.5 988.75,833.41 1023.07,833.41 v1(1023.88,832.6)
UART0_RTS: J3_B.4 J5_B.4 U1_B.17 | length 1714.2
  Top Layer w5: v1(1072.82,857.3) 1074.52,855.6 1124.04,855.6 J3_B.4 1156.25,853.9 1467.46,1165.11 2472.69,1165.11 2550.63,1087.16 2550.63,1068.46 U1_B.17
  Bottom Layer w5: v1(1072.82,857.3) 1074.58,855.54 1124.1,855.54 J5_B.4
UART0_RX: J3_B.7 J5_B.7 | length 111.7
  Top Layer w5: J3_B.7 969.48,813.3 1032.53,813.3 v1(1033.17,812.66)
  Bottom Layer w5: J5_B.7 988.88,813.59 1032.23,813.59 v1(1033.17,812.66)
UART0_TX: J3_B.6 J5_B.6 | length 101.9
  Top Layer w5: v1(1075.28,835.44) 1075.89,834.83 1125.13,834.83 J3_B.6
  Bottom Layer w5: v1(1075.28,835.44) 1075.96,834.76 1125.19,834.76 J5_B.6
VCC: C13_B.1 SW1_B.4 SW1_B.5 SW1_B.6 U4_B.3 U4_B.4
VCC_1: J3_B.15 J3_B.16 J5_B.15 J5_B.16 SW1_B.1 | length 507.5
  Top Layer w10: J3_B.15 v1(1056.84,735.79) J3_B.16 1201.22,735.79 1250.98,686.02 SW1_B.1
  Bottom Layer w5: J5_B.15 v1(1056.84,735.79) J5_B.16
VCC_2: J3_B.17 J3_B.18 J5_B.17 J5_B.18 SW1_B.2 | length 593
  Top Layer w10: J3_B.17 v1(1035.43,716.1) J3_B.18 1179.61,716.1 1188.98,706.74 1188.98,551.18 1203.82,536.34 1234.33,536.34 SW1_B.2
  Bottom Layer w5: J5_B.17 v1(1035.43,716.1) J5_B.18
VCC_3: J3_B.19 J3_B.20 J5_B.19 J5_B.20 SW1_B.3 | length 750.5
  Top Layer w5: J3_B.20 1156.25,696.42 J3_B.20@1158.67,694
  Top Layer w10: J3_B.19 968.34,696.5 1062.64,696.5 v1(1062.99,696.85) 1062.99,503.94 1153.54,413.39 1244.68,413.39 SW1_B.3 ; v1@1063.35,696.5 1125.66,696.5 J3_B.20
  Bottom Layer w10: J5_B.19 988.16,696.63 1062.78,696.63 v1(1062.99,696.85) 1063.21,696.63 1125.52,696.63 J5_B.20
pads on no net: J3_B.14 J5_B.14 U1_B.1 U1_B.3 U1_B.4 U1_B.6 U1_B.7 U1_B.9 U1_B.10 U1_B.11 U1_B.12 U1_B.13 U1_B.15 U1_B.19 U1_B.20 U1_B.21
copper on no net:
  other v2: 2509.84,970.47 2553.15,970.47 2509.84,1013.78 2553.15,1013.78

## Polygon pours and split planes (outlines as drawn)
GND on Bottom Layer "GND_L02_P001" (solid, pour order 1): 964.57,1220.47 964.57,374.02 2972.44,374.02 2972.44,1220.47
VCC on Top Layer "VCC_L01_P000" (solid, pour order 0): 964.57,1220.47 964.57,374.02 2972.44,374.02 2972.44,1220.47

## Silkscreen, mask and mechanical layers (free items; w line width, h text height)
Mechanical 1:
  lines w1: 905.43,389.76 ccw(c1000,389.76) 1003.94,295.28 ; 905.51,1181.1 cw(c1000,1185.04) 1000,1279.61 2932.99,1279.61 ; 1004.02,295.19 2937.01,295.19 ccw(c2937.01,389.76) 3031.5,393.7 ; 2933.07,1279.53 cw(c2937.01,1185.04) 3031.58,1185.04 3031.58,393.78

## Text inside footprints (layer, text, board x,y; h text height)
U2_B: Top Overlay "*" at 1873.34,939.85 h30 r180; Mechanical 13 "*" at 1836.09,977.85 h50 r180